# Altium PCB PCB1.PcbDoc
Units mm, origin at the board's own origin, x right, y up, seen from the top; angles counter-clockwise.
Board outline 57.15 x 57.15 mm, 2 copper layers (Top Layer, Bottom Layer); 50 components, 38 nets, 203 pads, 36 vias.
Unrouted connection lines stored in the file: 1.
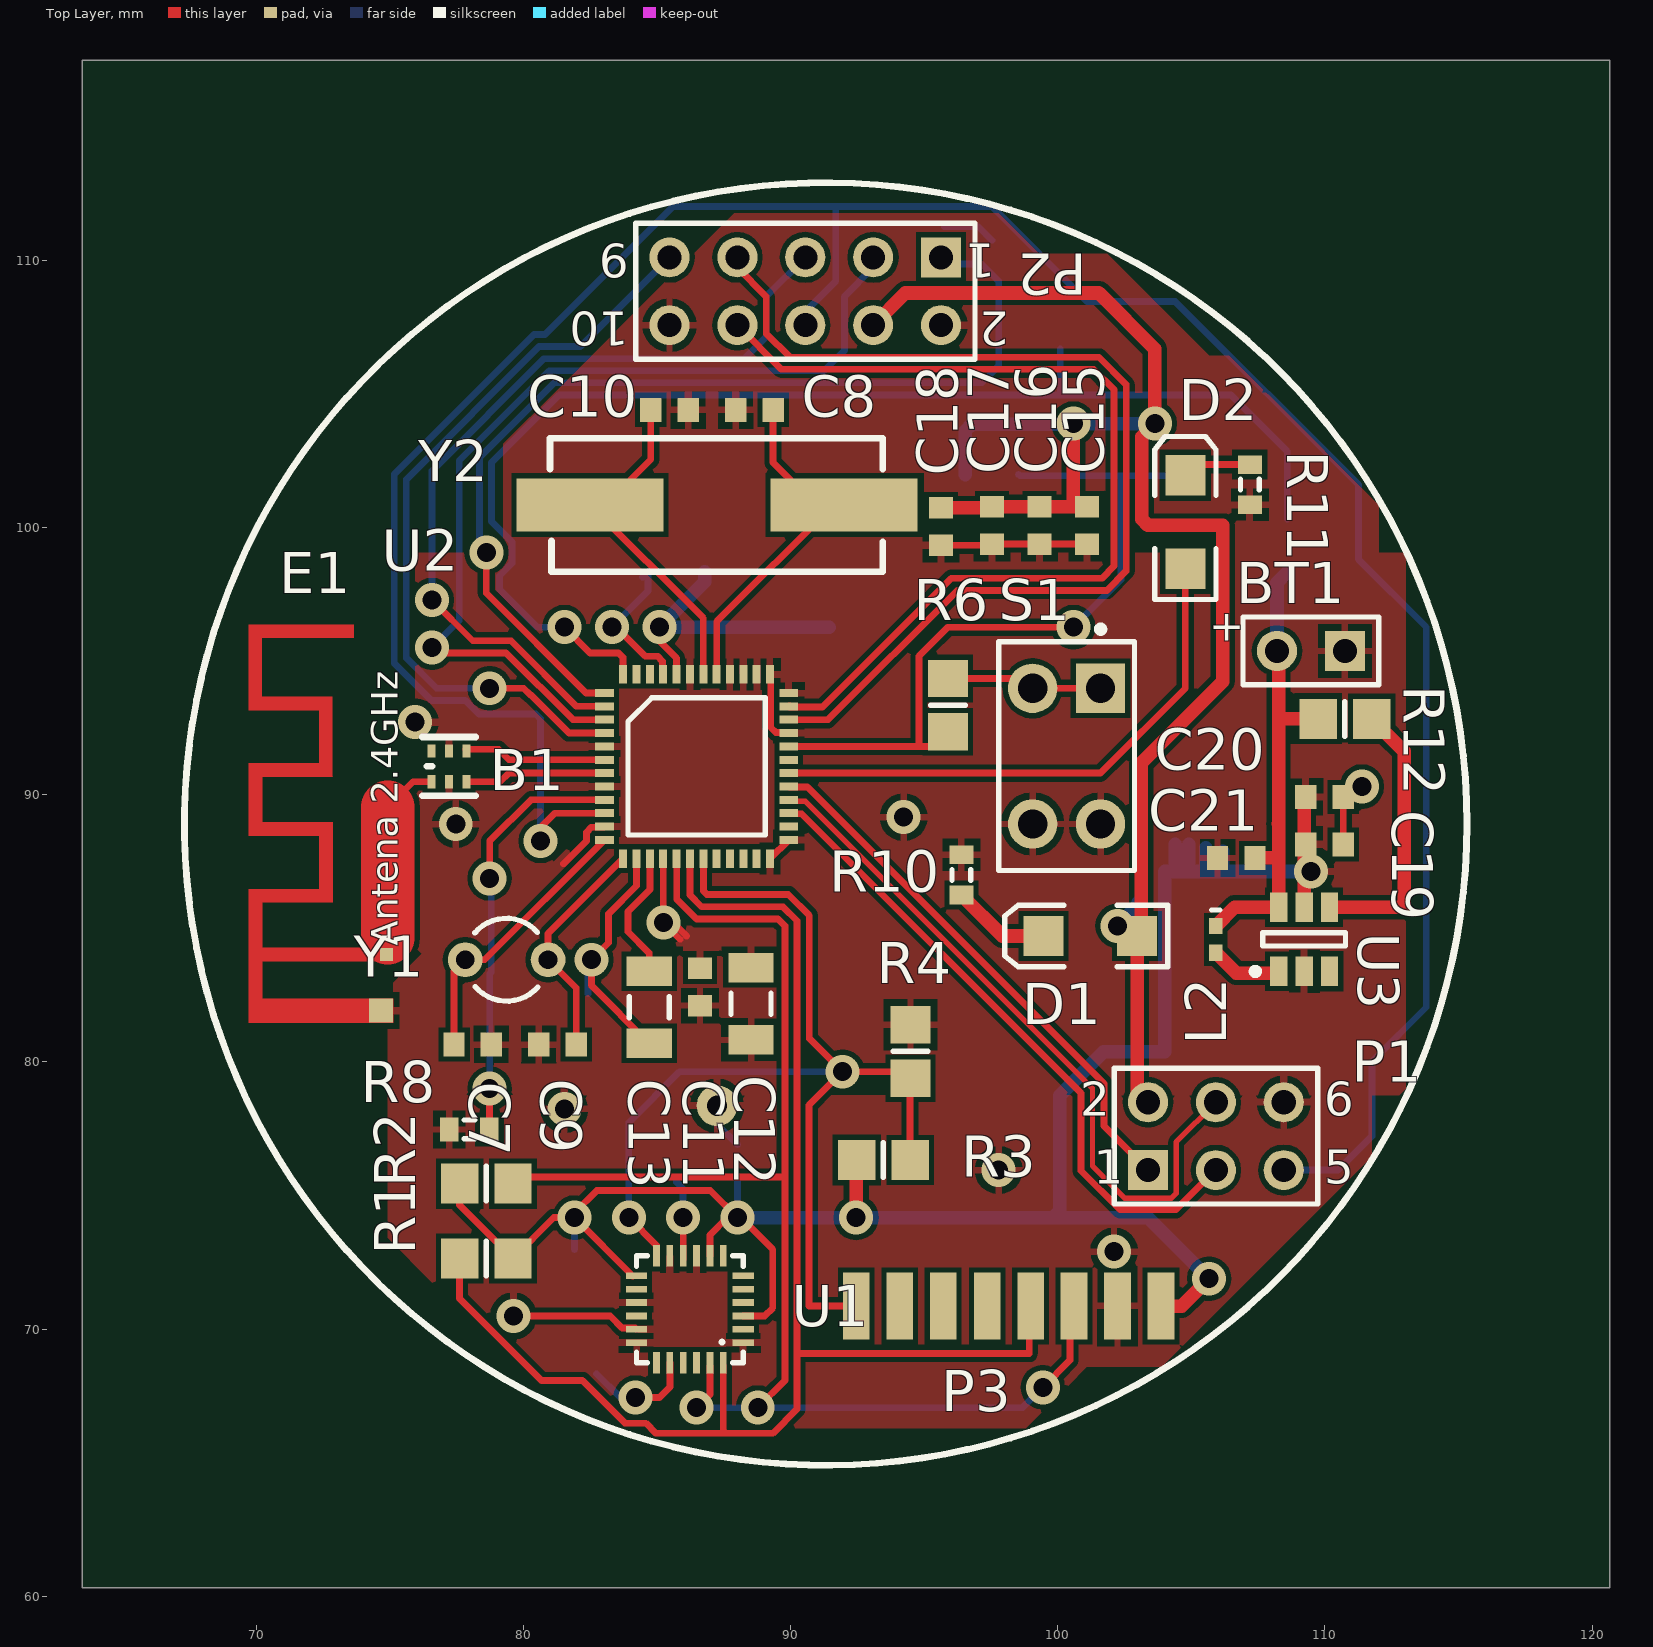
[diagram p0: Top Layer view]
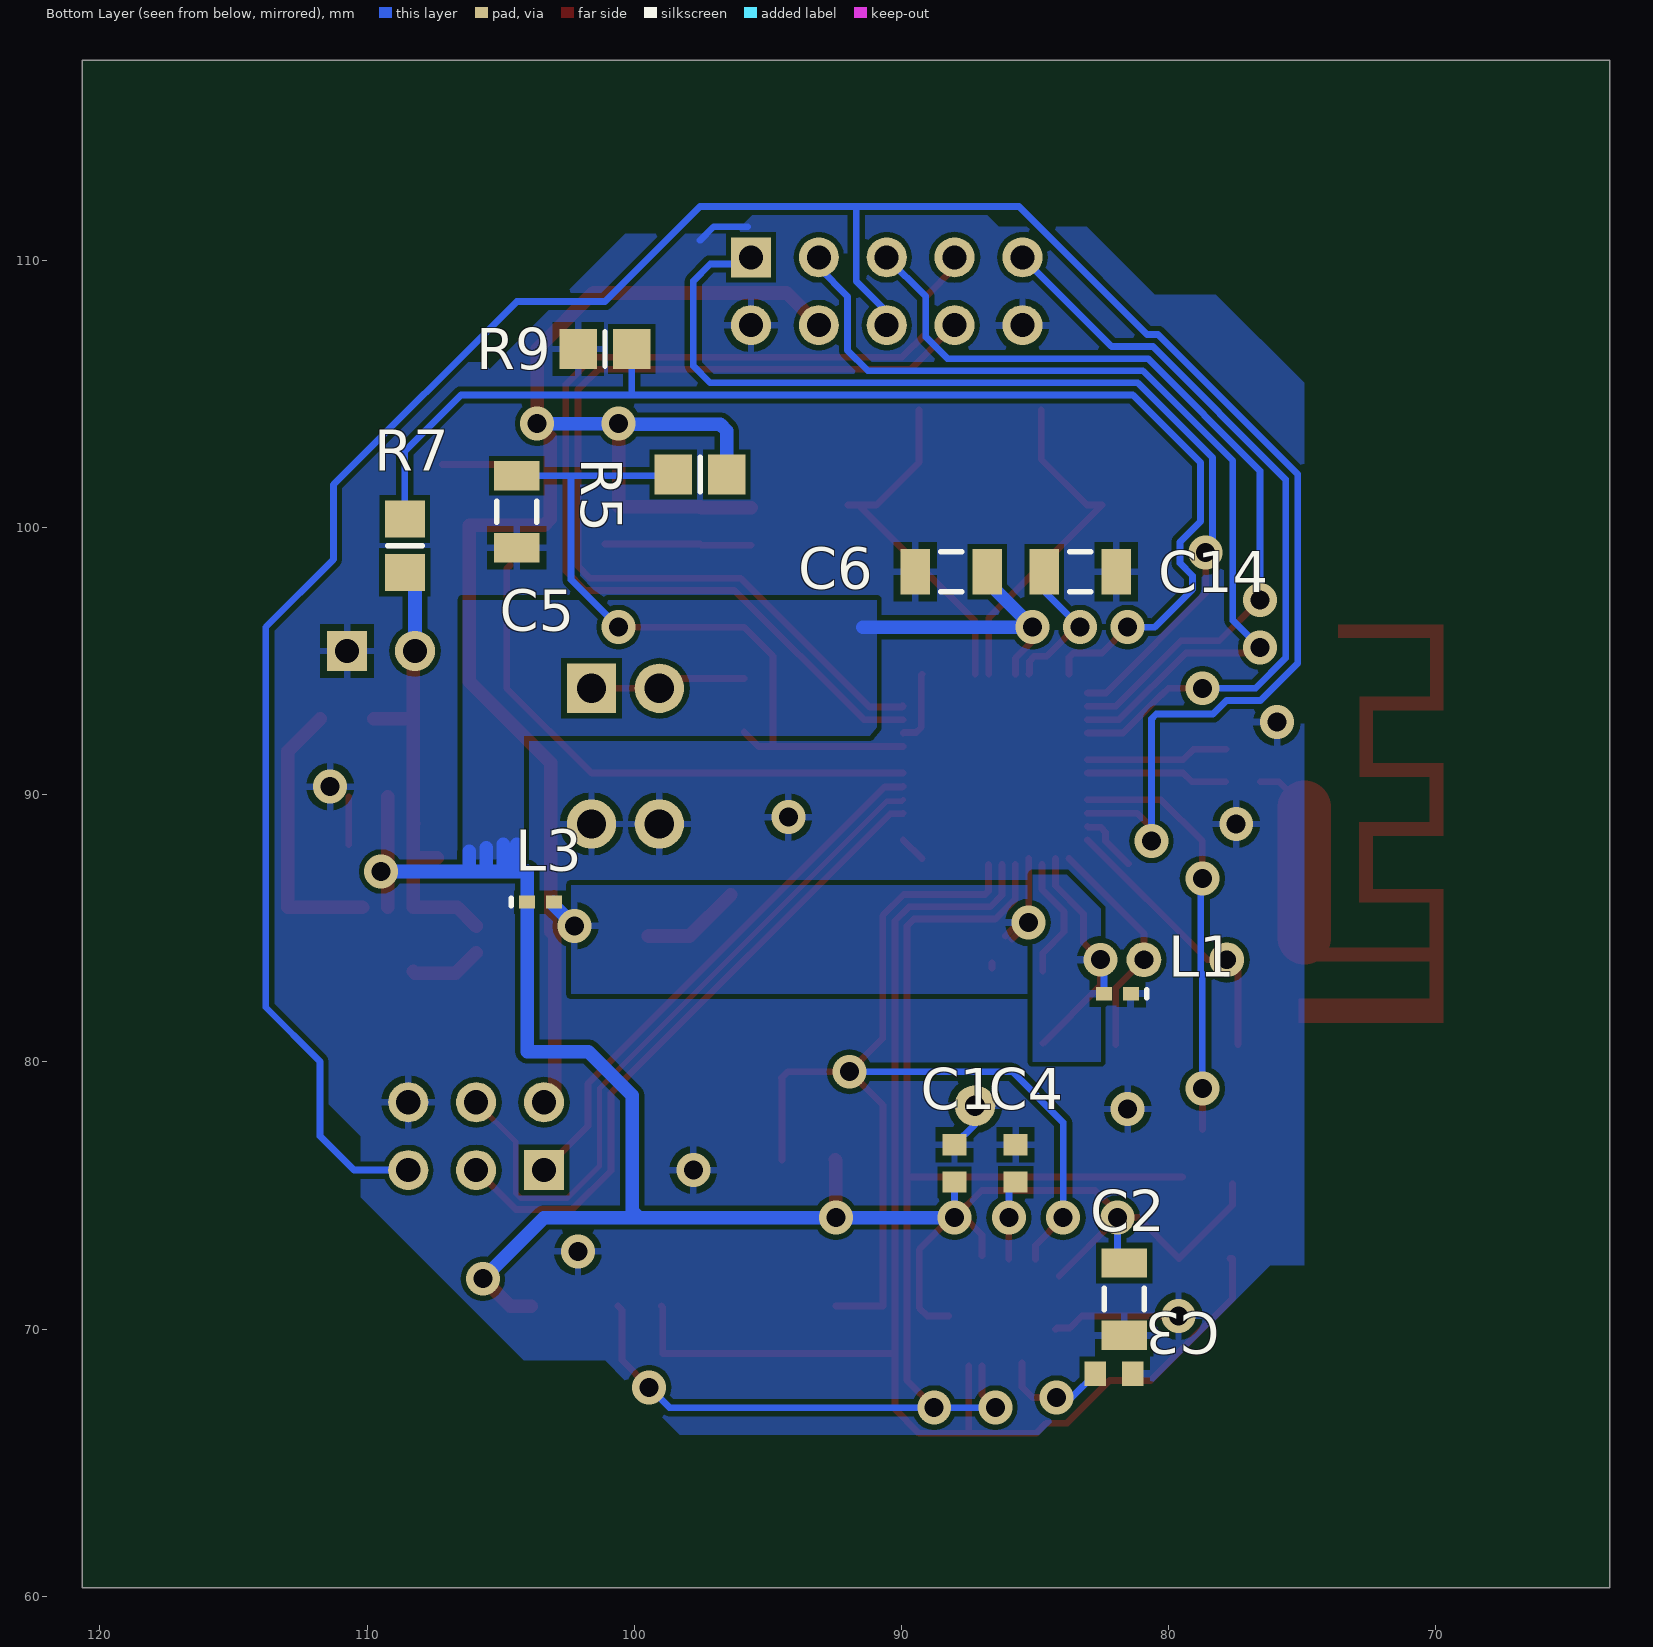
[diagram p1: Bottom Layer view, seen from below]

## Layer stack, top to bottom
Top Layer: signal copper 0.0356
Dielectric: dielectric 0.32, FR-4, Dk 4.8
Bottom Layer: signal copper 0.0356

## Board outline
63.5,117.475 120.65,117.475 120.65,60.325 63.5,60.325

## Design rules (kind name [scope] priority, off if disabled: settings)
Clearance [All] p1: gap=0.199
DiffPairsRouting [All] p1: maxlimit=0.254 minlimit=0.254 mostfreqgap=0.254 maxuncoupledlength=12.7
PlaneClearance [All] p1: clearance=0.381
PolygonConnect [All] p1: connectstyle=Relief reliefconductorwidth=0.254 reliefentries=4 polygonreliefangle="90 Angle" airgapwidth=0.254
RoutingVias [All] p1: holewidth=0.711 width=1.27 viastyle="Through Hole" minholewidth=0.457 minwidth=0.711 maxholewidth=0.711 maxwidth=1.27
SolderMaskExpansion [All] p1: expansion=0.152
Width [All] p1: maxlimit=0.508 minlimit=0.152 preferedwidth=0.254
26 further rules are at their usual default settings.

## Classes and differential pairs
net class PowerWB2_Nets: 3_3V 3_3V_RF "BATERIA 0.85~3V" GND NetR12_1 NetU3_3 SW_IN
net class CoreWB_Nets: 3_3V 3_3V_RF ADC0 "BATERIA 0.85~3V" GND INT_9150 JTAG_TCK JTAG_TDI JTAG_TDO JTAG_TMS LED1 MISO MOSI NetB1_1 NetC7_2 NetC8_2 NetC9_2 NetC10_2 NetC13_1 NetC13_2 NetC14_1 NetD1_2 NetD2_2 NetR6_1 NetR8_1 NRST PULS RF_N RF_P SCK SCL SDA UART_RXD0 UART_TXD0
net class ConnWB_Nets: 3_3V 3_3V_RF GND INT_9150 JTAG_TCK JTAG_TDI JTAG_TDO JTAG_TMS MISO MOSI NetC3_2 NetC4_2 NetP2_1 NetP2_3 NetP2_5 NetP2_7 NetP2_9 NetP3_5 NetP3_6 NetP3_7 NetU1_2 NetU1_4 NetU1_5 NetU1_6 NetU1_7 NetU1_14 NetU1_16 NetU1_19 NetU1_21 NetU1_22 NRST SCK SCL SDA UART_RXD0 UART_TXD0
component class PowerWB2: BT1 C15 C16 C17 C18 C19 C20 C21 L2 L3 R12 U3
component class CoreWB: B1 C5 C6 C7 C8 C9 C10 C11 C12 C13 C14 D1 D2 E1 L1 R5 R6 R7 R8 R10 R11 S1 U2 Y1 Y2
component class ConnWB: C1 C2 C3 C4 P1 P2 P3 R1 R2 R3 R4 U1
differential pair RF: +RF_P -RF_N

## Components (designator, comment, footprint, x,y, rotation, side; value= is the part's Value field where it differs from the comment)
B1 "BALUN EMBER351 & 357" Balun 77.216,91.059 r180 top
BT1 "Battery" BAT-2 109.474,95.377 r180 top
C1 "Cap Semi" 1608[0603] 88.011,76.2 r270 bottom
C2 "Cap Semi" C1206 81.661,71.12 r270 bottom
C3 "Cap Semi" 1608[0603] 82.042,68.326 r0 bottom
C4 "Cap Semi" 1608[0603] 85.725,76.2 r270 bottom
C5 "Cap Semi" C1206 104.394,100.584 r270 bottom
C6 "Cap Semi" C1206 88.138,98.338 r0 bottom
C7 "Cap Semi" 1608[0603] 78.105,80.645 r180 top
C8 "Cap Semi" 1608[0603] 88.646,104.394 r0 top
C9 "Cap Semi" 1608[0603] 81.28,80.645 r0 top
C10 "Cap Semi" 1608[0603] 85.471,104.394 r180 top
C11 "Cap Semi" 1608[0603] 86.614,82.804 r90 top
C12 "Cap Semi" C1206 88.519,82.169 r270 top
C13 "Cap Semi" C1206 84.709,82.042 r270 top
C14 "Cap Semi" C1206 83.312,98.338 r180 bottom
C15 "Cap Semi" 1608[0603] 101.092,100.076 r90 top
C16 "Cap Semi" 1608[0603] 99.314,100.076 r90 top
C17 "Cap Semi" 1608[0603] 97.536,100.076 r90 top
C18 "Cap Semi" 1608[0603] 95.631,100.032 r90 top
C19 "Cap Semi" 1608[0603] 109.982,88.138 r180 top
C20 "Cap Semi" 1608[0603] 109.982,89.916 r180 top
C21 "Cap Semi" 1608[0603] 106.68,87.63 r0 top
D1 "LED2" 3.2X1.6X1.1 101.219,84.709 r180 top
D2 "LED2" 3.2X1.6X1.1 104.775,100.203 r90 top
E1 "Antenna2" ANTENNA 74.676,81.915 r0 top
L1 "Ferrite" 0402-A 81.915,82.55 r0 bottom
L2 "Inductor" 0402-A 105.918,84.582 r270 top
L3 "Ferrite" 0402-A 103.505,85.979 r180 bottom
P1 "Header 3X2" HDR2X3 103.378,75.946 r0 top
P2 "Header 5X2" HDR2X5 95.631,110.109 r180 top
P3 "Header 8" Conector8 98.171,70.866 r180 top
R1 "DNP" 6-0805_M 78.613,72.644 r0 top
R2 "DNP" 6-0805_M 78.613,75.438 r180 top
R3 "DNP" 6-0805_M 93.472,76.327 r180 top
R4 "DNP" 6-0805_M 94.488,80.391 r270 top
R5 "Res3" 6-0805_M 97.536,101.981 r0 bottom
R6 "Res3" 6-0805_M 95.885,93.345 r270 top
R7 "Res3" 6-0805_M 108.585,99.314 r90 bottom
R8 "Res3" J1-0603 77.978,77.47 r180 top
R9 "Res3" 6-0805_M 101.092,106.68 r0 bottom
R10 "Res3" J1-0603 96.393,86.995 r270 top
R11 "Res3" J1-0603 107.188,101.6 r90 top
R12 "Res3" 6-0805_M 110.744,92.837 r180 top
S1 "SW-PB" DPST-4 100.33,91.44 r270 top
U1 "MPU-9150" QFP-24 86.233,70.739 r180 top
U2 "ATMEGA644RFR2" Quad48 83.034,93.804 r0 top
U3 "AAT1217" SOT26A-6N 109.22,84.582 r90 top
Y1 "32.768 kHz" R38 79.375,83.82 r270 top
Y2 "16MHz" XTAL 87.249,100.838 r180 top

## Footprints (in the part's own frame and the unit in brackets; to place one, negate y for a bottom-side part, rotate by r counter-clockwise, add the part's x,y. Pads: shape width x height; smd on the part's side, far side on the other; paste and mask are expansions set on the pad)
3.2X1.6X1.1 [mm] "SMT LED; 2 Flat Leads"
  rect 1.5x1.5 smd: 1(-1.75,0) 2(1.75,0)
  silkscreen extent -2.9,-1.15 3.2,1.15
6-0805_M [mm] "Chip Resistor, Body 2.0x1.2mm, IPC Low Density"
  rect 1.4x1.5 smd: 1(-1,0) 2(1,0)
  silkscreen extent 0,-0.65 0,0.65, body extent -1.07,-0.7 1.07,0.7, height 0.7
0402-A [mm] "Chip Inductor, Body 1.0x0.5mm, IPC High Density"
  rect 0.6x0.5 smd: 1(-0.5,0) 2(0.5,0)
  silkscreen extent -1.1,-0.15 -1.1,0.15, body extent -0.55,-0.3 0.55,0.3, height 0.55
1608[0603] [mm] "Chip Capacitor, Body 1.6x0.8mm, IPC High Density"
  rect 0.8x0.9 smd: 1(-0.7,0) 2(0.7,0)
  body extent -0.87,-0.48 0.87,0.48, height 1.3
ANTENNA [mm] "2.4 GHz Inverted F Antenna"
  rect 0.5x0.5 smd mask+0: 1(0.2,2.1)
  rect 0.9x0.9 smd mask+0: 2(0,0)
  Top Layer region: -4.45,4.55 -4.45,4.05 -1.81,4.05 -1.81,4.55
  Top Layer region: -4.45,-0.45 -4.95,-0.45 -4.95,4.55 -4.45,4.55
  Top Layer region: 0.45,0.45 -4.45,0.45 -4.45,-0.45 0.45,-0.45
  Top Layer region: -1.81,4.55 -2.31,4.55 -2.31,6.55 -1.81,6.55
  Top Layer region: -1.81,6.55 -1.81,7.05 -4.45,7.05 -4.45,6.55
  Top Layer region: -4.45,6.55 -4.95,6.55 -4.95,9.25 -4.45,9.25
  Top Layer region: -4.45,9.25 -4.45,8.75 -1.81,8.75 -1.82,8.76 -1.82,9.25
  Top Layer region: -1.82,9.25 -2.32,9.25 -2.32,11.25 -1.82,11.25
  Top Layer region: -1.82,11.25 -1.82,11.75 -4.46,11.75 -4.46,11.25
  Top Layer region: -4.46,11.25 -4.96,11.25 -4.96,13.95 -4.46,13.95
  Top Layer region: -4.96,13.95 -4.96,14.45 -1.02,14.45 -1.02,13.95
  Top Layer region: -4.45,1.85 -4.45,2.35 0.45,2.35 0.45,1.85
Balun [mm]
  rect 0.3x0.5 smd: 1(0.65,0.575) 2(0,0.575) 3(-0.65,0.575) 4(-0.65,-0.575) 5(0,-0.575) 6(0.65,-0.575)
  silkscreen extent -1,-1.1 1,1.1
BAT-2 [mm] "Battery; 2 Leads"
  rect 1.5x1.5 hole 0.9: 1(-1.27,0)
  round 1.5 hole 0.9: 2(1.27,0)
  silkscreen extent -2.54,-1.27 2.54,1.27
C1206 [mm] "Chip Capacitor, Body 3.2x1.6mm, IPC High Density"
  rect 1.1x1.7 smd: 1(-1.35,0) 2(1.35,0)
  silkscreen extent -0.4,-0.75 0.4,0.75, body extent -1.7,-0.9 1.7,0.9, height 1.3
Conector8 [mm]
  rect 1x2.5 smd: 1(-5.689,0.008) 2(-4.064,0.008) 3(-2.439,0.008) 4(-0.814,0.008) 5(0.811,0.008) 6(2.461,0.008) 7(4.086,0.008) 8(5.711,0.008)
DPST-4 [mm] "Switch; 4 Leads"
  rect 1.85x1.85 hole 1.1: 1(-2.54,1.27)
  round 1.85 hole 1.1: 2(-2.54,-1.27) 3(2.54,-1.27) 4(2.54,1.27)
  silkscreen extent -4.88,-2.54 4.28,2.54
HDR2X3 [mm] "Connector; Header; 3x2 Position"
  rect 1.5x1.5 hole 0.9: 1(0,0)
  round 1.5 hole 0.9: 2(0,2.54) 3(2.54,0) 4(2.54,2.54) 5(5.08,0) 6(5.08,2.54)
  silkscreen extent -1.27,-1.27 6.35,3.81
HDR2X5 [mm] "Connector; Header; 5x2 Position"
  rect 1.5x1.5 hole 0.9: 1(0,0)
  round 1.5 hole 0.9: 2(0,2.54) 3(2.54,0) 4(2.54,2.54) 5(5.08,0) 6(5.08,2.54) 7(7.62,0) 8(7.62,2.54) 9(10.16,0) 10(10.16,2.54)
  silkscreen extent -1.27,-1.27 11.43,3.81
J1-0603 [mm] "Chip Resistor, Body 1.6x0.8mm, IPC High Density"
  rect 0.7x0.9 smd: 1(-0.75,0) 2(0.75,0)
  silkscreen extent -0.2,-0.35 0.2,0.35, body extent -0.85,-0.48 0.85,0.48, height 0.9
QFP-24 [mm]
  rect 0.8x0.25 smd: 1(-2,1.25) 2(-2,0.75) 3(-2,0.25) 4(-2,-0.25) 5(-2,-0.75) 6(-2,-1.25) 13(2,-1.25) 14(2,-0.75) 15(2,-0.25) 16(2,0.25) 17(2,0.75) 18(2,1.25)
  rect 0.25x0.8 smd: 7(-1.25,-2) 8(-0.75,-2) 9(-0.25,-2) 10(0.25,-2) 11(0.75,-2) 12(1.25,-2) 19(1.25,2) 20(0.75,2) 21(0.25,2) 22(-0.25,2) 23(-0.75,2) 24(-1.25,2)
  silkscreen extent -2,-2 2,2
Quad48 [mm]
  rect 0.7x0.3 smd: 1(0,0) 2(0,-0.5) 3(0,-1) 4(0,-1.5) 5(0,-2) 6(0,-2.5) 7(0,-3) 8(0,-3.5) 9(0,-4) 10(0,-4.5) 11(0,-5) 12(0,-5.5) 25(6.9,-5.5) 26(6.9,-5) 27(6.9,-4.5) 28(6.9,-4) 29(6.9,-3.5) 30(6.9,-3) 31(6.9,-2.5) 32(6.9,-2) 33(6.9,-1.5) 34(6.9,-1) 35(6.9,-0.5) 36(6.9,0)
  rect 0.3x0.7 smd: 13(0.7,-6.2) 14(1.2,-6.2) 15(1.7,-6.2) 16(2.2,-6.2) 17(2.7,-6.2) 18(3.2,-6.2) 19(3.7,-6.2) 20(4.2,-6.2) 21(4.7,-6.2) 22(5.2,-6.2) 23(5.7,-6.2) 24(6.2,-6.2) 37(6.2,0.7) 38(5.7,0.7) 39(5.2,0.7) 40(4.7,0.7) 41(4.2,0.7) 42(3.7,0.7) 43(3.2,0.7) 44(2.7,0.7) 45(2.2,0.7) 46(1.7,0.7) 47(1.2,0.7) 48(0.7,0.7)
  silkscreen extent 0.89,-5.31 6.01,-0.18
R38 [mm] "Crystal, Thru-Hole; 2 Leads; Body 3.1 x 8.2 mm (Dia.xH)"
  round 1.3 hole 0.7: 1(0,1.55) 2(0,-1.55)
  silkscreen extent -1.55,-1.19 1.55,1.17
SOT26A-6N [mm] "SOT23, 6-Leads, Body 2.9x1.7mm, Pitch 0.95mm, Lead Span 2.8mm, IPC Medium Density"
  rect 1.1x0.65 smd: 1(-1.2,0.95) 2(-1.2,0) 3(-1.2,-0.95) 4(1.2,-0.95) 5(1.2,0) 6(1.2,0.95)
  silkscreen extent -1.32,-1.55 0.25,1.95, body extent -0.9,-1.55 0.9,1.55, height 1.45
XTAL [mm]
  rect 5.5x2 smd: 1(-4.75,0) 2(4.75,0)
  silkscreen extent -6.2,-2.5 6.25,2.5

## Part data
BT1: "Multicell Battery"
C1 C2 C3 C4 C5 C6 C7 C8 C9 C10 C11 C12 C13 C14 C15 C16 C17 C18 C19 C20 C21: "Capacitor (Semiconductor SIM Model)"
D1 D2: "Typical RED, GREEN, YELLOW, AMBER GaAs LED"
E1: library part AntennaF, "Antenna 2.4GHz"
L1 L3: library part Inductor, "Inductor"
P1: "Header, 3-Pin, Dual row"
P2: "Header, 5-Pin, Dual row"
P3: "Header, 8-Pin"
R1 R2 R3 R4: library part Res3, "Resistor"
R5 R6 R7 R8 R9 R10 R11 R12: "Resistor"
S1: "Switch"
U1: "Integrated 9-axis MotionTracking device"
Y1 Y2: library part XTAL, "Crystal Oscillator"

## Free pads (board coordinates)
  round 1.524 hole 0.762: 2(87.249,78.359) 4(31.75,455.93) 5(31.75,455.295) 6(31.75,542.29) 7(36.195,542.29) 8(59.69,541.655) 9(130.81,626.11)

## Via types
v1: diameter 1.27, hole 0.711, Top Layer to Bottom Layer, 36 vias

## Nets (pads, with @x,y where several pads share a name; then routed paths per layer and width w, separated by ;. In a path a pad name is that pad's centre, name@x,y a point inside that pad or via, vN(x,y) a via of type N, cw(c..) or ccw(c..) an arc to the next point about the centre after c; other vN are vias at no path point)
3_3V: C1.2 C2.1 C6.1 C19.2 C20.2 L3.1 P3.1 R1.2 R2.2 R3.2 U1.3 U1.8 U1.13 U2.44 U3.5 | length 90
  Top Layer w0.254: R2.2 77.613,74.644 R1.2 81.137,74.168 v1(81.915,74.168) ; U1.13@84.094,71.989 v1(81.915,74.168) ; v1(85.09,96.266) 85.09,95.75 85.734,95.106 U2.44 ; U1.8 86.983,73.521 87.63,74.168 v1(88.011,74.168) ; U1.3 89.031,70.489 89.336,70.794 89.336,72.97 88.138,74.168 v1(88.011,74.168) ; v1(81.915,74.168) 81.915,74.35 82.749,75.184 86.995,75.184 v1(88.011,74.168)
  Top Layer w0.508: v1(92.456,74.168) 92.456,76.311 R3.2 ; P3.1 104.64,70.858 v1(105.664,71.882) ; U3.5 C20.2@109.22,89.916
  Bottom Layer w0.254: C2.1@81.915,72.978 v1(81.915,74.168) ; v1(88.011,74.168) C1.2
  Bottom Layer w0.508: C6.1 86.788,97.964 v1(85.09,96.266) 91.44,96.266 ; v1(88.011,74.168) v1(92.456,74.168) 99.822,74.168 ; 104.394,88.138 104.394,87.122 ; 104.902,88.138 104.902,87.122 ; 105.537,88.011 105.537,87.122 ; v1(105.664,71.882) 103.378,74.168 99.822,74.168 ; 106.172,87.884 106.172,87.122 ; v1(109.474,87.122) 106.172,87.122 ; 99.822,74.168 100.076,74.422 100.076,78.74 101.719,80.383 104.005,80.383 L3.1 104.005,87.122 104.394,87.122 ; 104.394,87.122 104.902,87.122 ; 104.902,87.122 105.537,87.122 ; 105.537,87.122 106.172,87.122
3_3V_RF: C11.2 C12.1 C15.2 C16.2 C17.2 C18.2 D1.1 L3.2 P1.2 P2.4 R5.1 U2.16 | length 67.4
  Top Layer w0.254: U2.16 85.234,85.22 v1(85.237,85.217) ; 85.871,84.583 v1(85.237,85.217) ; 86.106,84.709 85.605,85.21 85.605,85.217 v1(85.237,85.217) ; C11.2 C11.2@86.614,83.693
  Top Layer w0.508: P2.4 94.294,108.772 101.54,108.772 103.632,106.68 v1(103.632,103.886) 103.141,103.395 103.141,100.313 103.378,100.076 106.172,100.076 106.172,94.234 103.124,91.186 103.124,84.864 D1.1 102.969,78.895 P1.2 ; C18.2 97.492,100.732 C17.2 C16.2 100.584,100.776 v1(100.584,103.886)
  Bottom Layer w0.508: R5.1 96.536,103.616 96.774,103.854 100.552,103.854 v1(100.584,103.886) v1(103.632,103.886) ; v1(102.235,85.09) 103.005,85.86 L3.2
ADC0: R7.2 R9.1 U2.48 | length 47.5
  Top Layer w0.254: v1(81.534,96.266) 82.495,95.305 83.566,95.305 83.734,95.137 U2.48
  Bottom Layer w0.254: v1(81.534,96.266) 80.518,96.266 79.102,97.682 79.102,98.19 79.574,98.662 79.574,99.458 78.812,100.22 78.812,102.428 81.341,104.957 100.076,104.957 ; R9.1 100.092,104.973 100.076,104.957 ; R7.2 108.585,102.853 106.481,104.957 100.076,104.957
"BATERIA 0.85~3V": BT1.2 C21.2 L2.1 R7.1 R12.2 U3.6 | length 17.7
  Top Layer w0.508: L2.1 106.618,85.782 U3.6@108.266,85.782 ; C21.2 108.266,87.63 ; BT1.2 108.266,95.315 108.266,92.837 ; 108.25,88.916 108.266,88.9 ; U3.6 U3.6@108.266,85.782 ; R12.2 108.266,92.837 ; U3.6@108.266,85.782 108.266,87.63 ; 108.266,87.63 108.266,88.9 ; 108.266,88.9 108.266,92.837
  Bottom Layer w0.508: BT1.2 108.204,97.933 R7.1
GND: B1.2 B1.5 B1.6 BT1.1 C1.1 C2.2 C3.1 C4.1 C5.2 C6.2 C7.1 C8.1 C9.1 C10.1 C11.1 C12.2 C14.2 C15.1 C16.1 C17.1 C18.1 C19.1 C20.1 C21.1 E1.2 L1.1 P1.6 P2.2 P2.10 P3.2 pad.2 R4.1 R8.2 R9.2 R10.1 R11.1 S1.3 S1.4 U1.1 U1.9 U1.11 U1.15 U1.17 U1.18 U2.5 U2.8 U2.11 U2.24 U2.25 U2.33 U2.36 U2.37 U2.38 U2.39 U2.40 U2.43 U3.2 | length 21.9
  Top Layer w0.254: v1(79.629,70.485) 83.251,70.485 83.698,70.038 84.184,70.038 U1.17 ; 81.5,87.41 82.358,88.269 82.358,88.589 82.549,88.78 83.01,88.78 U2.11 ; U2.24 U2.25 ; U2.37 89.258,94.48 89.258,92.519 89.449,92.328 89.91,92.328 U2.33 ; C18.1 97.492,99.332 C17.1 C16.1 C15.1 ; C19.1 C20.1
  Bottom Layer w0.254: pad.2 87.249,77.662 C1.1 ; 95.758,111.252 97.028,111.252 97.536,110.744
  other v1: 102.108,72.898 97.79,75.946 81.534,78.232 77.47,88.9 94.234,89.154 111.379,90.297 75.946,92.71
INT_9150: P3.8 R3.1 R4.2 U1.12 U2.19 | length 42.8
  Top Layer w0.254: v1(83.947,74.168) 84.983,73.132 U1.12@84.983,72.612 ; U2.19@86.737,87.382 86.737,86.387 86.866,86.258 89.914,86.258 90.703,85.469 90.703,80.874 v1(91.948,79.629) ; P3.8 92.452,70.866 90.695,70.866 90.695,78.376 v1(91.948,79.629) ; R3.1 94.472,79.375 R4.2 94.25,79.629 v1(91.948,79.629)
  Bottom Layer w0.254: v1(83.947,74.168) 83.947,77.724 85.852,79.629 v1(91.948,79.629)
JTAG_TCK: P2.1 U2.1 | length 37.7
  Top Layer w0.254: v1(78.613,99.06) 78.613,97.536 82.345,93.804 U2.1
  Bottom Layer w0.254: v1(78.613,99.06) 78.359,99.314 78.359,102.616 81.153,105.41 97.155,105.41 97.79,106.045 97.79,109.22 97.155,109.855 95.885,109.855 P2.1
JTAG_TDI: P2.9 U2.4 | length 28.6
  Top Layer w0.254: v1(78.74,93.98) 80.01,93.98 80.264,93.726 80.291,93.726 81.713,92.304 U2.4
  Bottom Layer w0.254: v1(78.74,93.98) 76.746,93.98 75.62,95.106 75.62,101.799 80.59,106.769 82.131,106.769 P2.9
JTAG_TDO: P2.3 U2.3 | length 35
  Top Layer w0.254: v1(76.581,95.504) 76.78,95.305 79.352,95.305 81.853,92.804 U2.3
  Bottom Layer w0.254: v1(76.581,95.504) 77.597,96.52 77.597,102.495 80.965,105.863 91.258,105.863 92.015,106.62 92.015,108.645 93.091,109.721 P2.3
JTAG_TMS: P2.5 U2.2 | length 31.1
  Top Layer w0.254: v1(76.581,97.282) 78.105,95.758 79.54,95.758 81.994,93.304 U2.2
  Bottom Layer w0.254: v1(76.581,97.282) 76.581,102.119 80.778,106.316 88.28,106.316 89.087,107.123 89.087,108.645 P2.5
LED1: D2.1 U2.30 | length 20.8
  Top Layer w0.254: U2.30 101.599,90.804 104.775,93.98 D2.1 D2.1@104.648,98.58
MISO: P1.1 U2.29 | length 20.3
  Top Layer w0.254: U2.29 89.958,90.28 90.628,90.28 101.727,79.181 101.727,77.597 P1.1
MOSI: P1.4 U2.28 | length 26.5
  Top Layer w0.203: U2.28 89.983,89.755 90.549,89.755 101.299,79.004 101.299,76.099 102.503,74.895 104.253,74.895 104.429,75.071 104.429,76.997 P1.4
NetB1_1: B1.1 E1.1 | length 7
  Top Layer w0.254: 74.876,84.591 74.93,84.645 ; 74.93,89.535 75.879,90.484 B1.1
  Top Layer w2: 74.93,84.645 74.93,89.535
NetC3_2: C3.2 U1.20 | length 4.2
  Top Layer w0.254: v1(84.201,67.437) 85.09,67.437 85.483,67.83 U1.20
  Bottom Layer w0.254: C3.2 83.631,67.437 v1(84.201,67.437)
NetC4_2: C4.2 U1.10 | length 3
  Top Layer w0.254: v1(85.979,74.168) 85.983,74.164 U1.10@85.983,72.612
  Bottom Layer w0.254: C4.2 85.979,75.246 v1(85.979,74.168)
NetC7_2: C7.2 U2.12 Y1.2 | length 10.4
  Top Layer w0.254: C7.2 77.405,83.4 Y1.2 78.55,83.82 U2.12
NetC8_2: C8.2 U2.41 Y2.1 | length 13.4
  Top Layer w0.254: U2.41 87.234,96.473 Y2.1@91.599,100.838 ; C8.2 89.346,102.424 90.932,100.838 Y2.1@91.599,100.838 ; Y2.1 Y2.1@91.599,100.838
NetC9_2: C9.2 U2.13 Y1.1 | length 8.6
  Top Layer w0.254: C9.2 81.98,82.765 Y1.1 80.925,84.795 U2.13
NetC10_2: C10.2 U2.42 Y2.2 | length 12.9
  Top Layer w0.254: C10.2 84.771,102.551 83.058,100.838 Y2.2 86.734,96.603 U2.42
NetC13_1: C13.1 U2.15 | length 4.7
  Top Layer w0.254: C13.1 84.709,84.074 83.915,84.868 83.915,85.629 84.737,86.451 U2.15@84.737,87.382
NetC13_2: C13.2 L1.2 U2.14 | length 9.8
  Top Layer w0.254: U2.14 84.234,86.589 83.185,85.54 83.185,84.455 v1(82.55,83.82) 82.55,82.851 C13.2
  Bottom Layer w0.254: L1.2 82.415,83.685 v1(82.55,83.82)
NetC14_1: C14.1 U2.45 | length 5.8
  Top Layer w0.254: v1(83.312,96.266) 83.472,96.266 84.558,95.18 85.019,95.18 85.21,94.989 85.21,94.528 U2.45
  Bottom Layer w0.254: v1(83.312,96.266) 84.662,97.616 C14.1 C14.1@84.455,98.131
NetD1_2: D1.2 R10.2 | length 3.7
  Top Layer w0.508: R10.2 97.929,84.709 D1.2
NetD2_2: D2.2 R11.2 | length 2.6
  Top Layer w0.254: D2.2 105.172,102.35 R11.2
NetR6_1: R6.1 S1.1 S1.2 | length 5.9
  Top Layer w0.254: R6.1 98.695,94.345 S1.2 S1.1
NetR8_1: R8.1 U2.9 | length 15.8
  Top Layer w0.254: R8.1 78.728,78.982 v1(78.74,78.994) ; v1(78.74,86.868) 78.74,88.265 80.279,89.804 U2.9
  Bottom Layer w0.254: v1(78.74,78.994) 78.74,83.294 78.801,83.355 78.801,86.807 v1(78.74,86.868)
NetR12_1: R12.1 U3.4 | length 10.3
  Top Layer w0.508: U3.4 112.96,85.782 112.96,91.621 R12.1
NRST: P1.5 P2.6 U2.10 | length 100.7
  Top Layer w0.254: v1(80.645,88.265) 80.645,88.773 81.176,89.304 U2.10
  Bottom Layer w0.254: v1(80.645,88.265) 80.645,92.837 80.463,93.019 78.342,93.019 77.834,93.527 76.558,93.527 75.167,94.918 75.167,101.987 80.402,107.222 80.806,107.222 85.598,112.014 91.694,112.014 ; P2.6 90.551,108.077 91.694,109.22 91.694,112.014 ; P1.5 110.49,75.946 111.76,77.216 111.76,80.01 113.792,82.042 113.792,96.266 111.252,98.806 111.252,101.6 104.394,108.458 101.092,108.458 97.536,112.014 91.694,112.014
PULS: C5.1 R5.2 R6.2 U2.32 | length 28.1
  Top Layer w0.254: U2.32 94.742,91.804 ; R6.2 95.344,91.804 94.742,91.804 ; v1(100.584,96.266) 95.895,96.266 94.809,95.18 94.809,91.871 94.742,91.804
  Bottom Layer w0.254: R5.2 98.583,101.934 102.362,101.934 ; v1(100.584,96.266) 102.362,98.044 102.362,101.934 ; C5.1 102.362,101.934
RF_N: B1.3 U2.7 | length 5.3
  Top Layer w0.254: B1.3 79.136,90.484 79.456,90.804 U2.7
RF_P: B1.4 U2.6 | length 5.3
  Top Layer w0.254: B1.4@77.851,91.694 79.076,91.694 79.466,91.304 U2.6
SCK: P1.3 U2.27 | length 24.4
  Top Layer w0.254: U2.27 89.958,89.28 90.419,89.28 100.872,78.827 100.872,75.922 102.326,74.468 104.43,74.468 105.908,75.946 P1.3
SCL: P3.3 R2.1 U1.23 U2.17 | length 52.9
  Top Layer w0.254: R2.1@79.486,75.692 89.662,75.692 ; U2.17@85.737,87.382 85.737,86.094 86.487,85.344 89.535,85.344 89.789,85.09 89.789,75.438 89.789,68.072 v1(88.773,67.056) ; v1(86.487,67.056) 86.983,67.552 U1.23@86.983,68.612 ; v1(99.441,67.818) 100.457,68.834 100.457,70.705 P3.3
  Bottom Layer w0.254: v1(86.487,67.056) v1(88.773,67.056) 98.679,67.056 v1(99.441,67.818)
SDA: P3.4 R1.1 U1.24 U2.18 | length 53.6
  Top Layer w0.254: R1.1@77.702,72.644 R1.1 77.613,71.142 80.683,68.072 82.207,68.072 83.803,66.476 84.582,66.476 84.963,66.095 87.575,66.095 ; U2.18@86.237,87.382 86.237,86.241 86.676,85.801 89.724,85.801 90.246,85.279 90.242,85.275 90.242,69.088 ; U1.24@87.483,68.612 87.483,66.187 87.575,66.095 ; P3.4 98.933,70.806 98.933,69.088 90.242,69.088 ; 87.575,66.095 89.336,66.095 90.242,67.001 90.242,69.088
SW_IN: L2.2 U3.1 | length 2.7
  Top Layer w0.508: L2.2 106.68,83.32 108.208,83.32 U3.1
UART_RXD0: P2.7 U2.34 | length 39.5
  Top Layer w0.254: P2.7 88.011,109.721 89.087,108.645 89.087,107.255 89.971,106.371 101.534,106.371 102.561,105.344 102.561,98.364 101.839,97.643 96.246,97.643 91.407,92.804 U2.34
UART_TXD0: P2.8 U2.35 | length 36.1
  Top Layer w0.254: P2.8 89.662,105.918 101.346,105.918 102.108,105.156 102.108,98.552 101.652,98.096 96.012,98.096 91.196,93.28 89.958,93.28 U2.35 U2.35@89.958,93.328
pads on no net: P3.5 P3.6 P3.7 U1.2 U1.4 U1.5 U1.6 U1.7 U1.14 U1.16 U1.19 U1.21 U1.22 U2.20 U2.21 U2.22 U2.23 U2.26 U2.31 U2.46 U2.47 U3.3

## Polygon pours and split planes (outlines as drawn)
3_3V_RF on Top Layer "Top Layer-No Net" (solid, pour order 27): 85.237,85.11 85.237,84.348 85.217,84.328 85.979,84.328 85.979,83.058 89.535,83.058 89.535,84.836 89.281,85.09 85.257,85.09 85.237,85.11 85.237,84.602 85.217,84.582
GND on Top Layer "Top Layer-No Net" (solid, pour order 40): 83.058,80.01 83.185,80.137 83.185,86.36 83.185,86.995 81.915,88.265 79.375,85.725 76.835,85.725 76.2,85.09 76.2,80.01 82.55,80.01 83.185,80.01
GND on Top Layer "Top Layer-No Net" (solid, pour order 42): 75.565,93.345 75.565,91.44 82.898,91.44 83.034,91.304 83.034,93.304 75.606,93.304 75.565,93.345 75.565,92.71
GND on Top Layer "Top Layer-No Net" (solid, pour order 44): 76.2,88.265 79.375,88.265 81.28,90.17 83.185,90.17 83.185,90.805 76.2,90.805 76.2,88.265
GND on Top Layer "Top Layer-No Net" (solid, pour order 46): 81.534,105.156 94.996,105.156 94.996,98.806 94.234,98.044 93.726,97.536 90.678,97.536 89.662,97.536 88.646,96.52 88.646,94.742 85.852,94.742 85.852,96.774 85.09,97.536 79.248,97.536 79.248,103.124 81.28,105.156 81.534,105.156
3_3V on Top Layer "Top Layer-No Net" (solid, pour order 50): 108.712,86.106 112.522,86.106 112.522,91.948 108.712,91.948 108.712,86.106
GND on Top Layer "Top Layer-No Net" (solid, pour order 64): 113.03,99.06 113.03,78.994 112.776,78.74 75.946,78.74 74.93,78.74 74.93,81.269 75.126,81.465 75.126,82.365 75.126,82.968 76.2,84.042 75.946,84.296 75.946,99.06 113.03,99.06
GND on Top Layer "Top Layer-No Net" (solid, pour order 66): 94.996,105.043 107.809,105.043 107.95,104.902 112.014,100.838 112.014,99.06 94.927,99.06 94.996,99.129 94.996,105.156
GND on Top Layer "Top Layer-No Net" (solid, pour order 70): 107.809,105.043 81.393,105.043 81.28,105.156 87.884,111.76 88.138,111.76 97.79,111.76 98.044,111.506 99.314,110.236 101.6,110.236 101.854,110.236 104.902,107.188 105.664,106.426 106.426,106.426 107.809,105.043
GND on Top Layer "Top Layer-No Net" (solid, pour order 72): 111.76,78.74 111.76,76.454 104.14,68.834 103.886,68.58 101.6,68.58 101.092,68.58 99.06,66.548 98.806,66.294 92.456,66.294 83.985,66.294 83.803,66.476 82.715,67.564 81.534,67.564 81.026,67.564 80.772,67.564 77.724,70.612 74.93,73.406 74.93,78.74
NetC13_2 on Bottom Layer "Top Layer-No Net" (solid, pour order 38): 82.55,85.09 82.55,85.725 83.82,86.995 85.09,86.995 85.09,80.01 82.55,80.01 82.55,85.09
3_3V on Bottom Layer "Top Layer-No Net" (solid, pour order 52): 90.932,97.282 90.932,92.519 91.186,92.202 104.648,92.202 104.648,97.123 104.775,97.282 90.932,97.282
3_3V on Bottom Layer "Top Layer-No Net" (solid, pour order 54): 104.443,97.282 106.426,97.282 106.426,87.122 104.14,87.122 104.14,97.282 104.902,97.282
3_3V_RF on Bottom Layer "Top Layer-No Net" (solid, pour order 56): 102.362,86.614 102.362,82.55 88.646,82.55 85.09,82.55 85.09,86.614 102.362,86.614 102.362,85.852 102.362,84.328
GND on Bottom Layer "Top Layer-No Net" (solid, pour order 74): 74.93,72.39 74.93,105.41 78.232,108.712 80.01,108.712 80.518,108.712 83.058,111.252 85.09,111.252 86.36,111.252 87.63,112.522 94.234,112.522 94.742,112.522 95.758,111.506 96.266,110.998 100.076,110.998 100.33,110.998 105.41,105.918 105.664,106.172 107.696,106.172 107.696,105.156 111.76,101.092 112.014,100.838 112.014,98.298 112.776,98.298 113.284,97.79 113.538,97.536 113.538,83.312 113.538,80.518 110.236,77.216 110.236,74.93 104.14,68.834 101.346,68.834 101.092,68.834 98.298,66.04 84.836,66.04 83.312,67.564 82.042,67.564 81.026,67.564 76.2,72.39 74.93,72.39

## Keep-outs
Top Overlay:
  circle w0.254: c91.316,88.9 r24

## Silkscreen, mask and mechanical layers (free items; w line width, h text height)
Mechanical 15:
  circle w0.254: c91.336,88.9 r25.25

## Text inside footprints (layer, text, board x,y; h text height)
BT1: Top Overlay "+" at 105.664,95.758 h1.15
E1: Top Overlay "Antena 2.4GHz" at 75.308,84.34 h1 r90
P1: Top Overlay "6" at 109.982,77.978 h1.27; Top Overlay "5" at 109.982,75.438 h1.27; Top Overlay "2" at 100.838,77.978 h1.27; Top Overlay "1" at 101.346,75.438 h1.27
P2: Top Overlay "10" at 83.947,108.077 h1.27 r180; Top Overlay "9" at 83.947,110.617 h1.27 r180; Top Overlay "1" at 97.663,110.617 h1.27 r180; Top Overlay "2" at 98.171,108.077 h1.27 r180